# Altium PCB PCB1_pwmbb.PcbDoc
Units mm, origin at the board's own origin, x right, y up, seen from the top; angles counter-clockwise.
Board outline 18 x 32 mm, 2 copper layers (Top Layer, Bottom Layer); 6 components, 6 nets, 36 pads, 5 vias.
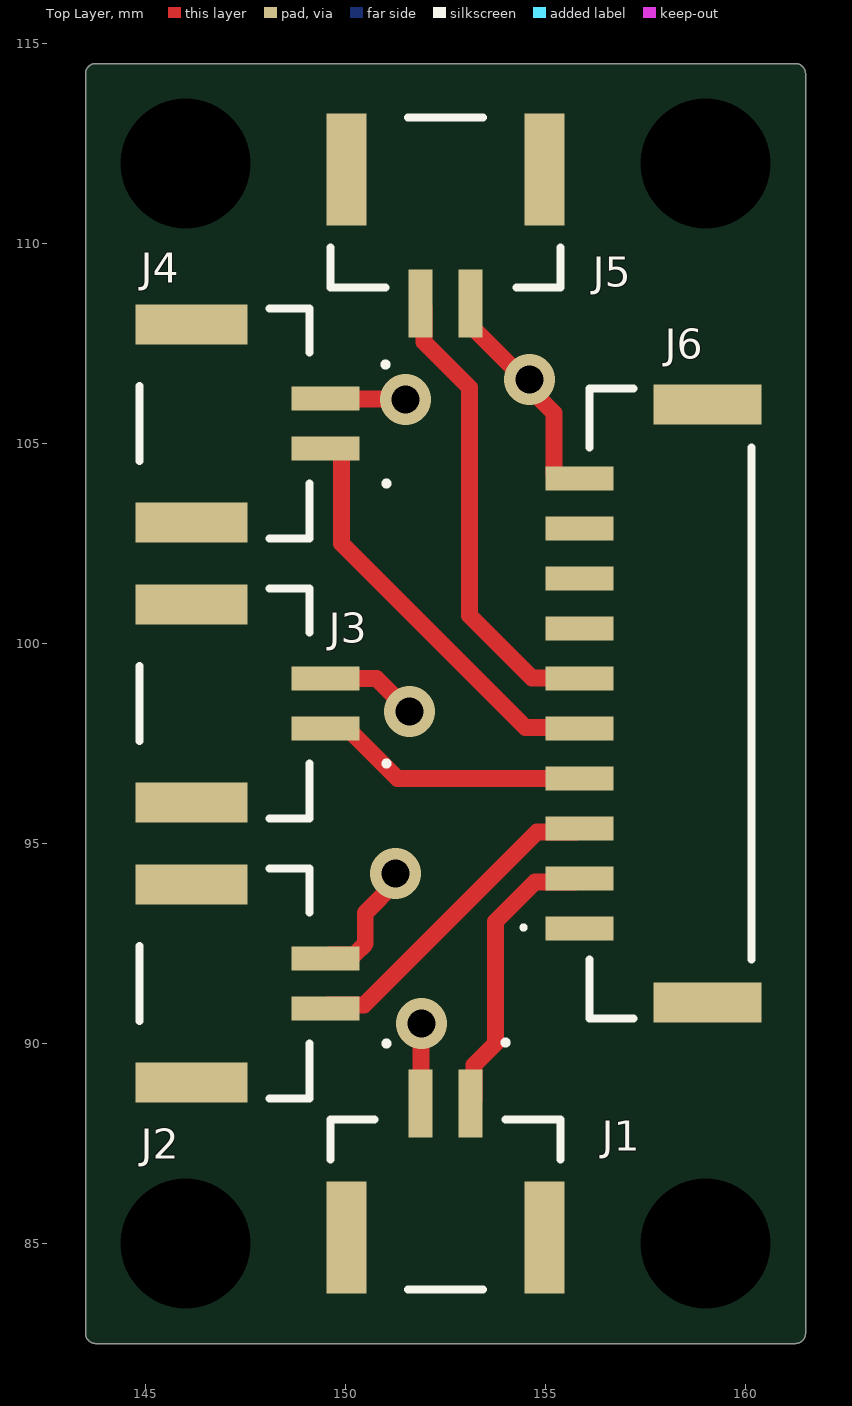
[diagram p0: Top Layer view]
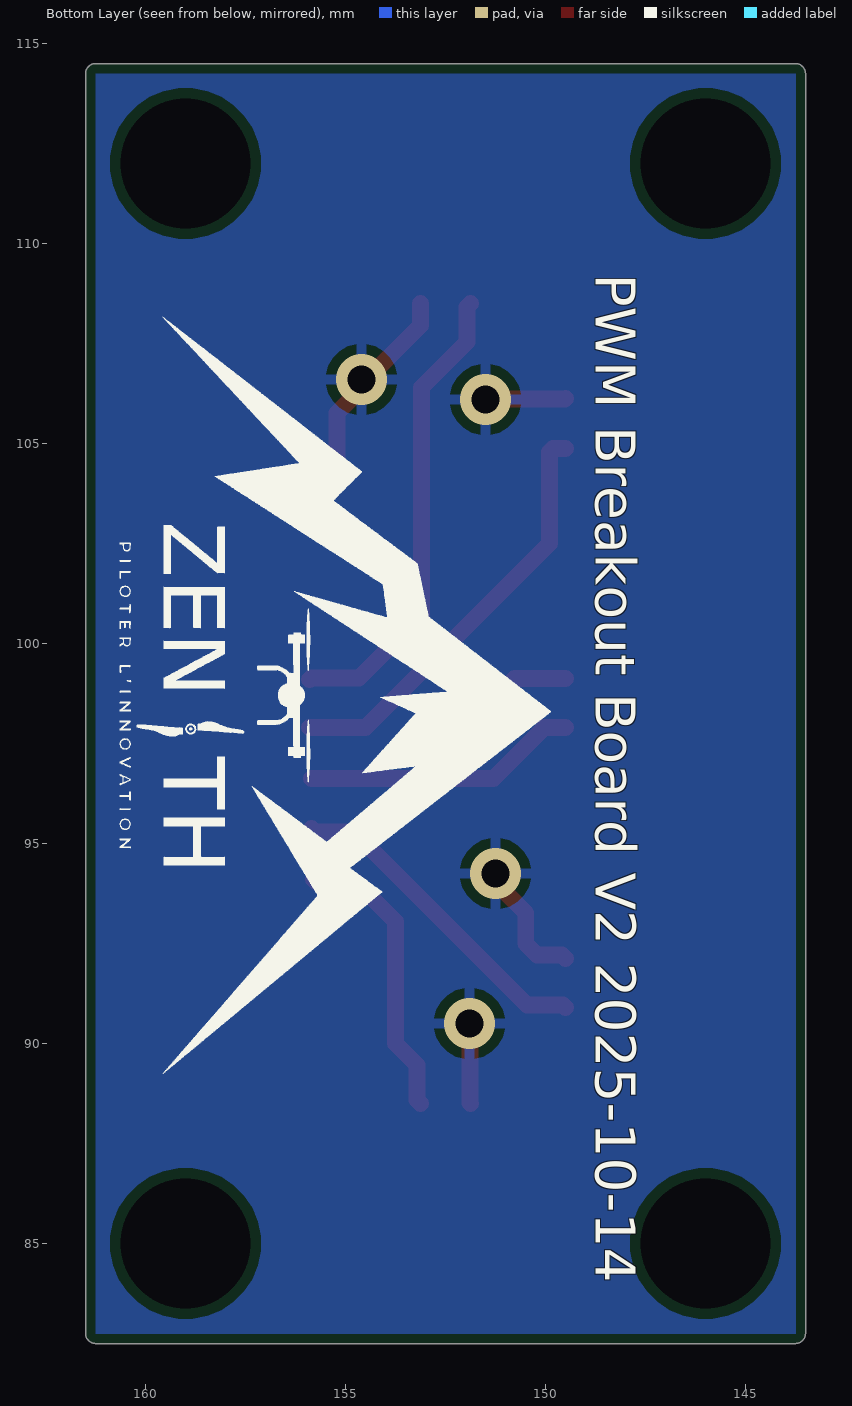
[diagram p1: Bottom Layer view, seen from below]
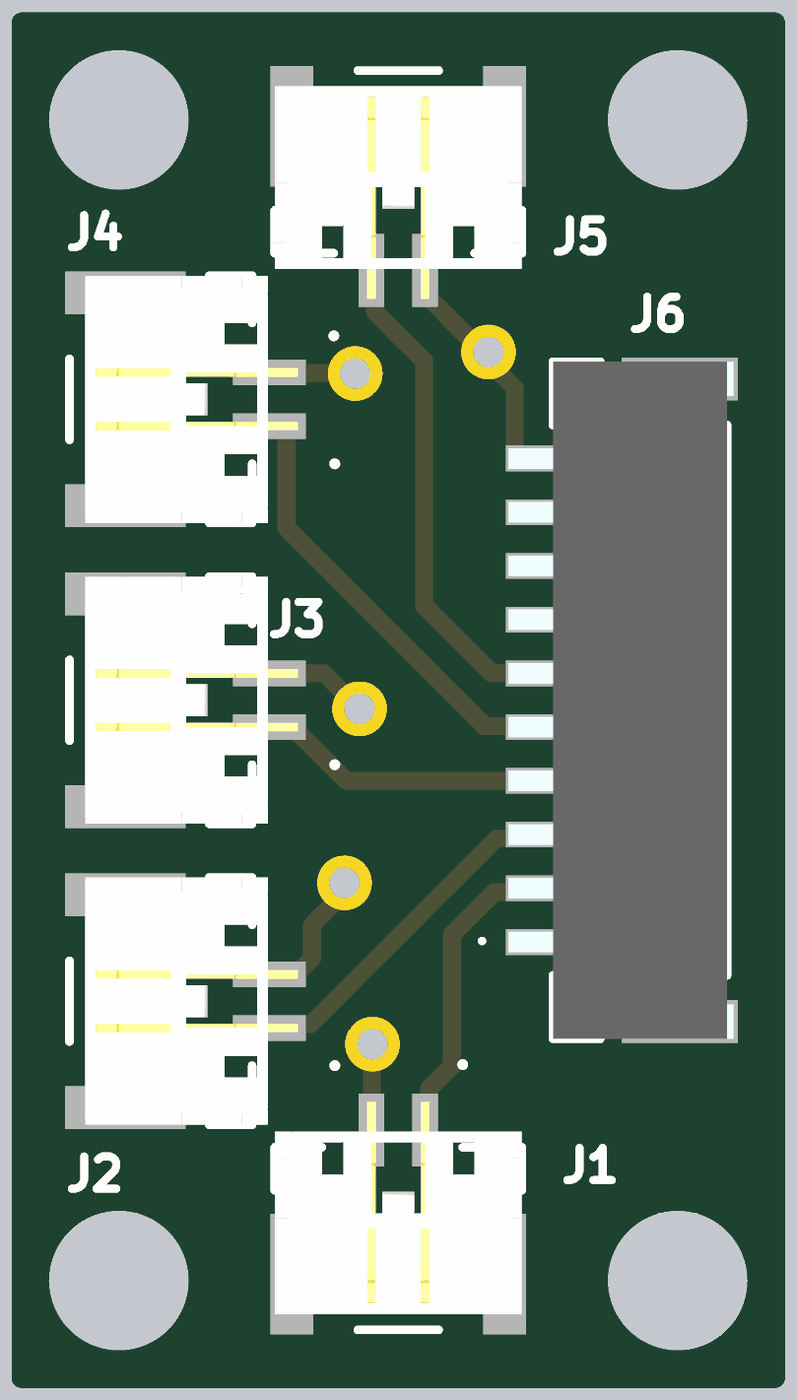
[diagram p2: 3D render of the assembled board from above, using the file's embedded part models]

## Layer stack, top to bottom
Top Solder: solder mask 0.0102, Solder Resist, Dk 3.5
Top Layer: signal copper 0.0356
Dielectric 1: dielectric 0.32, FR-4, Dk 4.8
Bottom Layer: signal copper 0.0356
Bottom Solder: solder mask 0.0102, Solder Resist, Dk 3.5

## Board outline
143.5,82.75 143.5,114.25 cw(c143.75,114.25) 143.75,114.5 161.25,114.5 cw(c161.25,114.25) 161.5,114.25 161.5,82.75 cw(c161.25,82.75) 161.25,82.5 143.75,82.5 cw(c143.75,82.75)

## Design rules (kind name [scope] priority, off if disabled: settings)
AcuteAngle [All] p1: minimum=3.00000000000000E+0001 checktracksonly=FALSE
Clearance [All] p1: gap=0.305 ignorepadtopadclearanceinfootprint=TRUE except(0: Arc-Hole Track-Hole SMDPad-Hole THPad-Hole Via-Hole Fill-Hole Poly-Hole Region-Hole; 0.152: SMDPad-SMDPad SMDPad-THPad SMDPad-Via; 0.254: Arc-Text Track-Text SMDPad-Text THPad-Text Via-Via Via-Text Fill-Text Poly-Text Region-Text Text-Text; 0.381: Arc-Arc Arc-Track Arc-SMDPad Arc-THPad Arc-Via Track-Track Track-SMDPad Track-THPad Track-Via THPad-THPad THPad-Via)
ComponentClearance [All] p1: gap=0.508 collisioncheckmode=3 verticalgap=0.508 showdistances=TRUE
DiffPairsRouting [All] p1: maxlimit=1.27 minlimit=0.305 mostfreqgap=0.305 toplayer_minwidth=0.305 toplayer_maxwidth=0.66 toplayer_prefwidth=0.508 bottomlayer_minwidth=0.305 bottomlayer_maxwidth=0.66 bottomlayer_prefwidth=0.508 maxuncoupledlength=0.508
Height [All] p1: minheight=0 maxheight=25.4 prefheight=25.4
HoleSize [All] p1: absolutevalues=TRUE maxlimit=3.25 minlimit=0.3 maxpercent=80.000 minpercent=20.000
HoleToHoleClearance [All] p1: gap=0.508 allowstackedmicrovias=TRUE
LayerPairs [All] p1: enforce=FALSE
MinimumAnnularRing [All] p1: minimumring=0.203
MinimumSolderMaskSliver [All] p1: minsoldermaskwidth=0
PermittedLayers [All] p1: toplayerpermitted=TRUE bottomlayerpermitted=TRUE
PlaneConnect [All] p1: planeconnectstyle=Relief reliefexpansion=0.508 reliefentries=4 reliefconductorwidth=0.508 reliefairgap=0.254
PolygonConnect [All] p1: thpad.connectstyle=Relief thpad.reliefconductorwidth=0.508 thpad.reliefentries=4 thpad.polygonreliefangle="45 Angle" thpad.airgapwidth=0.381 smdpad.connectstyle=Relief smdpad.reliefconductorwidth=0.254 smdpad.reliefentries=4 smdpad.polygonreliefangle="90 Angle" smdpad.airgapwidth=0.254 smdpad.conductorbypadedge=TRUE smdpad.mindistance=0.381 smdpad.enablemindistance=FALSE via.connectstyle=Relief via.reliefconductorwidth=0.508 via.reliefentries=4 via.polygonreliefangle="90 Angle" via.airgapwidth=0.254
RoutingCorners [All] p1: cornerstyle=45-Degree minsetback=0.508 maxsetback=2.54
RoutingVias [All] p1: holewidth=0.8 width=1.27 viastyle="Through Hole" minholewidth=0.6 minwidth=1.108 maxholewidth=1 maxwidth=2.032
SMDEntry [All] p1: side=TRUE corner=TRUE anyangle=TRUE
SMDNeckDown [All] p1: percent=100.000
SilkToSilkClearance [All] p1: silktosilkclearance=0
SilkToSolderMaskClearance [All] p1: minsilkscreentomaskgap=0 clearancetoexposedcopper=TRUE
SolderMaskExpansion [All] p1: expansion=0 istentingtop=FALSE
UnRoutedNet [All] p1: checkbadconnections=TRUE
Width [All] p1: maxlimit=1.27 minlimit=0.305 preferedwidth=0.508
18 further rules are at their usual default settings.

## Components (designator, comment, footprint, x,y, rotation, side; value= is the part's Value field where it differs from the comment)
J1 "BM02B-GHS-TBT_LF__SN_" BM02B-GHS-TBT_1 152.5,88.5 r0 top
J2 "BM02B-GHS-TBT_LF__SN_" BM02B-GHS-TBT_1 149.5,91.5 r270 top
J3 "BM02B-GHS-TBT_LF__SN_" BM02B-GHS-TBT_1 149.5,98.5 r270 top
J4 "BM02B-GHS-TBT_LF__SN_" BM02B-GHS-TBT_1 149.5,105.5 r270 top
J5 "BM02B-GHS-TBT_LF__SN_" BM02B-GHS-TBT_1 152.5,108.5 r180 top
J6 "SM10B-GHS-TB" SM10BGHSTB 158,98.5 r90 top

## Footprints (in the part's own frame and the unit in brackets; to place one, negate y for a bottom-side part, rotate by r counter-clockwise, add the part's x,y. Pads: shape width x height; smd on the part's side, far side on the other; paste and mask are expansions set on the pad)
BM02B-GHS-TBT_1 [mm]
  rect 0.6x1.7 smd: 1(0.625,0) 2(-0.625,0)
  rect 1x2.8 smd: 3(-2.475,-3.35) 4(2.475,-3.35)
  silkscreen extent -2.88,-4.65 2.88,1.55, body extent -2.88,-4.29 2.88,0.66, height 4.21
SM10BGHSTB [mm]
  rect 0.6x1.7 smd: 1(-5.625,2.15) 2(-4.375,2.15) 3(-3.125,2.15) 4(-1.875,2.15) 5(-0.625,2.15) 6(0.625,2.15) 7(1.875,2.15) 8(3.125,2.15) 9(4.375,2.15) 10(5.625,2.15)
  rect 1x2.7 smd: MP1(-7.475,-1.05) MP2(7.475,-1.05)
  silkscreen extent -7.88,-2.15 7.88,3.6, body extent -7.88,-2.3 7.88,2.94, height 4.35

## Part data
J1 J2 J3 J4 J5: library part BM02B-GHS-TBT_LF__SN__N_, "Connector", Arrow Part Number=BM02B-GHS-TBT(LF)(SN)(N), Manufacturer_Name="JST (JAPAN SOLDERLESS TERMINALS)", Arrow Price/Stock=https://www.arrow.com/en/products/bm02b-ghs-tbt-lf-sn-n/jst-manufacturing?region=nac, Datasheet Link=http://www.jst-mfg.com/product/pdf/eng/eGH.pdf, Manufacturer_Part_Number=BM02B-GHS-TBT(LF)(SN)(N)
J6: "Connector", Manufacturer_Name="3D SYSTEMS", Datasheet Link=https://4donline.ihs.com/images/VipMasterIC/IC/JSTM/JSTMS02184/JSTMS02184-1.pdf?hkey=EF798316E3902B6ED9A73243A3159BB0, Height=4.25mm, Manufacturer_Part_Number=SM10B-GHS-TB

## Free pads (board coordinates)
  round 1.524 hole 3.25 unplated: MH(146,85) MH(146,112) MH(159,85) MH(159,112)

## Via types
v1: diameter 1.27, hole 0.711, Top Layer to Bottom Layer, 5 vias

## Nets (pads, with @x,y where several pads share a name; then routed paths per layer and width w, separated by ;. In a path a pad name is that pad's centre, name@x,y a point inside that pad or via, vN(x,y) a via of type N, cw(c..) or ccw(c..) an arc to the next point about the centre after c; other vN are vias at no path point)
GND: J1.2 J2.2 J3.2 J4.2 J5.2 J6.10 | length 15.6
  Top Layer w0.42: J2.2 149.59,92.215 150.215,92.215 150.493,92.493 150.493,93.263 151.25,94.02 v1(151.25,94.25) ; J3.2 150.775,99.125 v1(151.6,98.3) ; J4.2 149.513,106.113 151.487,106.113 v1(151.5,106.1) ; J1.2 151.888,88.513 151.888,90.487 v1(151.9,90.5) ; J5.2 153.125,107.95 154.475,106.6 v1(154.6,106.6) 154.6,106.37 155.21,105.76 155.21,104.215 155.3,104.125 J6.10
NetJ1_1: J1.1 J6.2 | length 7.3
  Top Layer w0.42: J1.1 153.215,88.59 153.215,89.465 153.75,90 153.75,93.05 154.737,94.037 155.737,94.037 J6.2@155.8,94.1
NetJ2_1: J2.1 J6.3 | length 8.2
  Top Layer w0.42: J2.1@149.5,90.9 149.565,90.965 150.465,90.965 154.785,95.285 155.76,95.285 J6.3
NetJ3_1: J3.1 J6.4 | length 6.9
  Top Layer w0.42: J3.1@149.5,97.9 150.025,97.9 151.3,96.625 J6.4
NetJ4_1: J4.1 J6.5 | length 10.6
  Top Layer w0.42: J4.1 149.81,104.875 149.9,104.785 149.9,102.5 154.5,97.9 J6.5@155.9,97.9
NetJ5_1: J5.1 J6.6 | length 11.8
  Top Layer w0.42: J5.1 151.965,108.41 151.965,107.535 153.1,106.4 153.1,100.7 154.662,99.138 155.862,99.138 J6.6@155.9,99.1
pads on no net: J1.3 J1.4 J2.3 J2.4 J3.3 J3.4 J4.3 J4.4 J5.3 J5.4 J6.1 J6.7 J6.8 J6.9 J6.MP1 J6.MP2

## Polygon pours and split planes (outlines as drawn)
GND on Bottom Layer "GND_L02_P000" (solid, pour order 0): 148.5,114.25 143.75,114.25 143.75,82.75 148.5,82.75 156.5,82.75 161.25,82.75 161.25,114.25 156.5,114.25

## Silkscreen, mask and mechanical layers (free items; w line width, h text height)
Bottom Overlay:
  drawing of 33 lines, arcs and shapes, not listed
  text "PWM Breakout Board V2 2025-10-14" at 148.75,109.25 h1 r90